# EAGLE board varalakshmisomasundaram (1) (EAGLE 9.7.0)

Size 289.07 x 104.07 mm. Coordinates in mm from the lower left corner, seen from the top.
Outline: 0,0 289.07,0 289.07,104.07 0,104.07 0,0
Copper layers (1*16): Top 0.035mm / dielectric 1.5mm / Bottom 0.035mm
Design rules "default": minimum track width 6mil, minimum drill 0.35mm, track to track 6mil, track to pad 6mil, pad to pad 6mil, via to via 6mil, smd to smd 6mil, copper to edge 40mil, drill to drill 6mil, minimum pad ring 10mil, minimum via ring 8mil, stop-mask expansion 4mil, vias tented up to drill 0mil, thermal gap 10mil

## Footprints (pad centres in the part's own frame; a part is rotated, then mirrored left to right if it is on the bottom)
LEDRD254W60D565H860B = drill 0.981 pad 1.581: 1 -1.27,0; 2 1.27,0
LU-5-R = drill 0.8: 1 -6.35,-3.81; 5 3.81,-3.81; 6 6.35,-3.81; 7 6.35,3.81; 8 3.81,3.81; 12 -6.35,3.81
1X02 = drill 1.016 long: 1 -1.27,0; 2 1.27,0
MOTOR = drill 1.118 pad 3.15 octagon: + 2.54,0; - -2.54,0
BATTERY-GENERIC = drill 1.118 pad 3.15 octagon: + 2.54,0; - -2.54,0
PIEZO = drill 1 pad 1.6: 1 -3.5,0; 2 3.5,0
28027 = drill 1.016 long: 1 -2.54,0; 2 0,0; 3 2.54,0
GL5528 = drill 0.8 pad 1.4: 1 -1.702,0; 2 1.702,0
RESAD1016W63L850D250B = drill 0.83 pad 1.43: 1 -5.08,0; 2 5.08,0
ARDUINO-UNO-R3-SHIELD = drill 1.016 pad 1.88: 3.3V 24.13,-2.54; 5V 24.13,0; A0 24.13,12.7; A1 24.13,15.24; A2 24.13,17.78; A3 24.13,20.32; A4 24.13,22.86; A5 24.13,25.4; AREF -24.13,-13.97; D2 -24.13,20.32; D3 -24.13,17.78; D4 -24.13,15.24; D5 -24.13,12.7; D6 -24.13,10.16; D7 -24.13,7.62; D8 -24.13,3.81; D9 -24.13,1.27; D10 -24.13,-1.27; D11 -24.13,-3.81; D12 -24.13,-6.35; D13 -24.13,-8.89; GND@0 24.13,2.54; GND@1 24.13,5.08; GND@2 -24.13,-11.43; IOREF 24.13,-7.62; NC 24.13,-10.16; RES 24.13,-5.08; RX -24.13,25.4; SCL -24.13,-19.05; SDA -24.13,-16.51; TX -24.13,22.86; VIN 24.13,7.62
TO92 = drill 0.813 octagon: 1 -1.27,0; 2 0,1.905; 3 1.27,0

## Placement (x,y rotation side)
D1  RED  [LEDRD254W60D565H860B]  35.59,96.16 180 top
K1  RELAY-SPDT_LU-5-R  [LU-5-R]  205.6,68.67 180 top
K2  RELAY-SPDT_LU-5-R  [LU-5-R]  205.1,38.96 180 top
L1  LIGHTBULB  [1X02]  234.45,80.13 0 top
M1  MOTOR_HDR  [MOTOR]  236.08,25.66 0 top
P1  BATTERYGENERIC  [BATTERY-GENERIC]  179.34,82.52 180 top
PIEZO1  PIEZO  [PIEZO]  277.33,87.68 0 top
PIR1  PIR-SENSOR_28027  [28027]  146.39,85.18 0 top
R1  PHOTOCELL_GL5528  [GL5528]  100.59,88.57 0 top
R2  1k  [RESAD1016W63L850D250B]  108.49,80.25 90 top
R3  220  [RESAD1016W63L850D250B]  37.75,77.2 90 top
U1  ARDUINO-UNO-R3-SHIELD  [ARDUINO-UNO-R3-SHIELD]  47.88,29.84 270 top
U2  TMP36GT9Z_TO92  [TO92]  122.43,88.57 0 top

## Library data of the parts
D1 = Tinkercad; CATEGORY: Opto-Electronic; SUB-CATEGORY: LED; VALUE: LED_RED
K1 K2 L1 M1 P1 PIEZO1 PIR1 R1-R3 U1 U2 = Tinkercad

## Nets
D1_A: D1.1 R3.2
L1_1: K1.6 L1.1
M1_+: K2.6 M1.+
P1+: K1.1 K2.1 P1.+
P1-: L1.2 M1.- P1.-
U1_5V: PIR1.2 R1.2 R2.2 U1.5V U2.3
U1_A4: U1.A4 U2.2
U1_A5: PIEZO1.1 R1.1 R3.1 U1.A5
U1_D5: K1.5 U1.D5
U1_D6: K2.8 U1.D6
U1_D8: PIR1.1 U1.D8
U1_GND: D1.2 K1.8 K2.5 PIEZO1.2 PIR1.3 R2.1 U1.GND@0 U1.GND@1 U1.GND@2 U2.1

## Tracks (layer width: path | path; a pad name or v marks a point on that pad's centre or on a via)
D1_A  (1 unrouted)
L1_1  (1 unrouted)
M1_+  (1 unrouted)
P1+  (2 unrouted)
P1-  (2 unrouted)
U1_5V  (4 unrouted)
U1_A4  (1 unrouted)
U1_A5  (3 unrouted)
U1_D5  (1 unrouted)
U1_D6  (1 unrouted)
U1_D8  (1 unrouted)
U1_GND  (9 unrouted)